# Altium PCB LEDS-SMD.PcbDoc
Units mm, origin at the board's own origin, x right, y up, seen from the top; angles counter-clockwise.
Board outline 27.69 x 26.16 mm, 2 copper layers (Top Layer, Bottom Layer); 11 components, 7 nets, 26 pads, 0 vias.
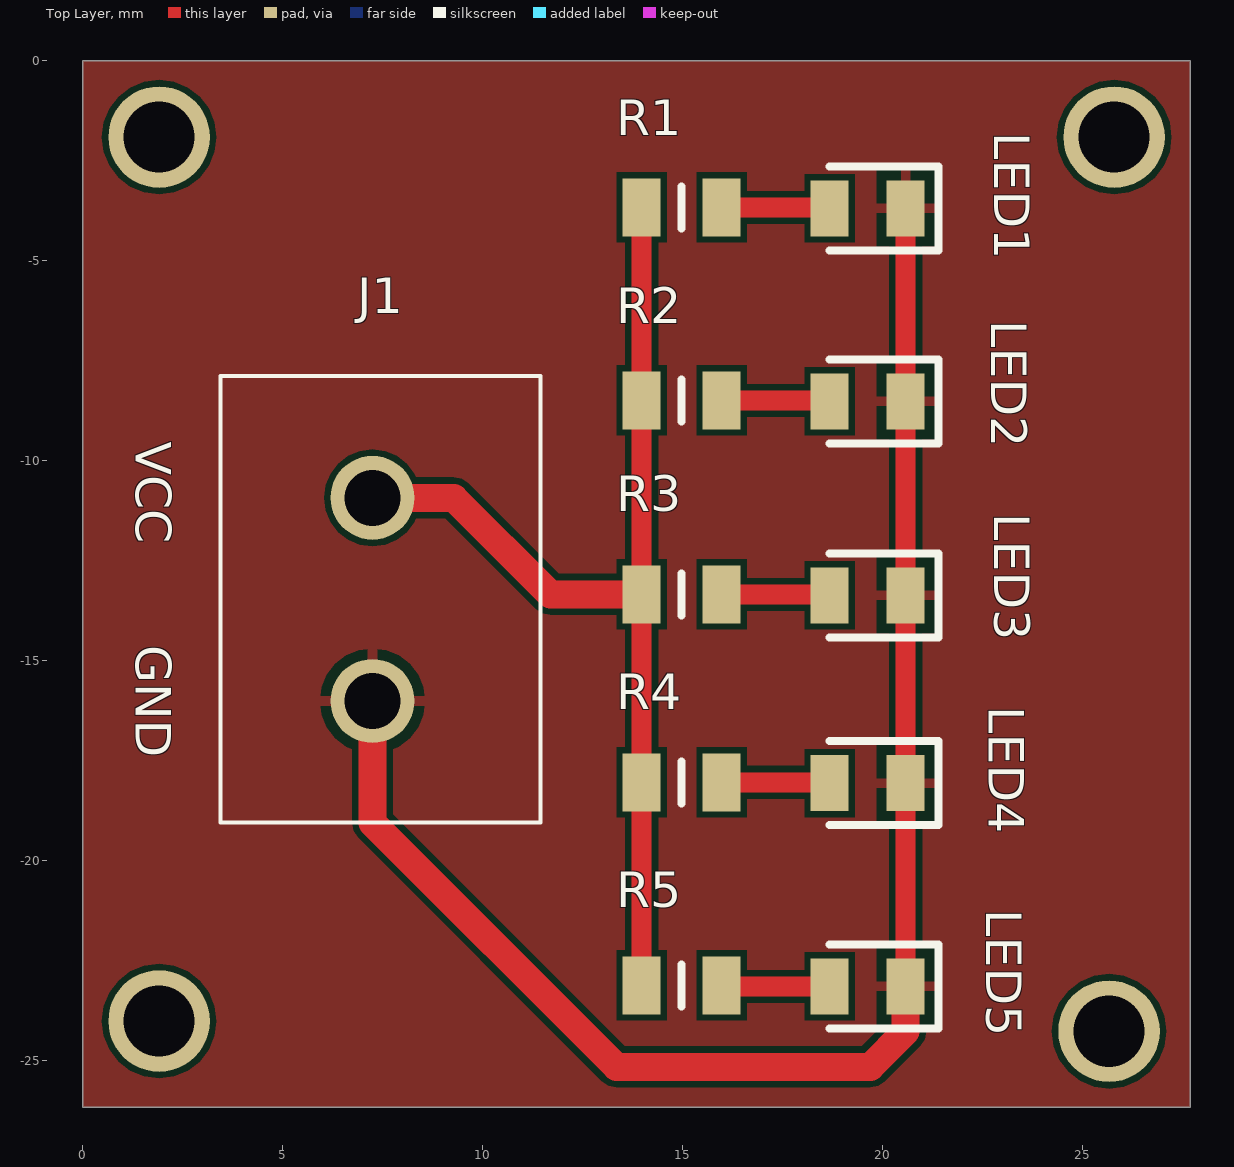
[diagram p0: Top Layer view]
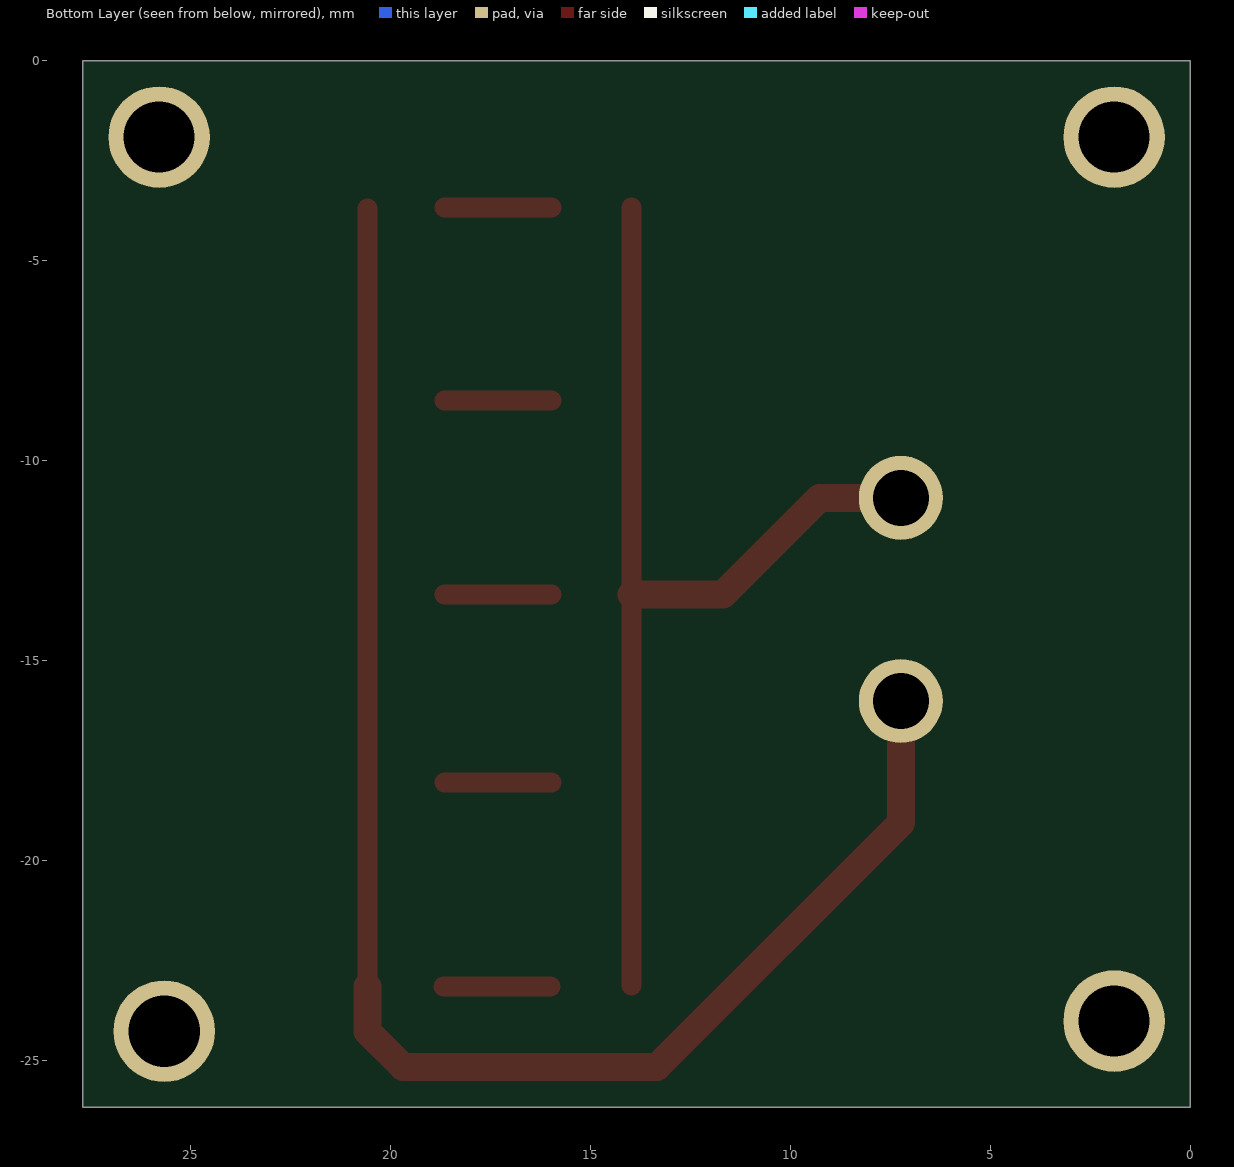
[diagram p1: Bottom Layer view, seen from below]
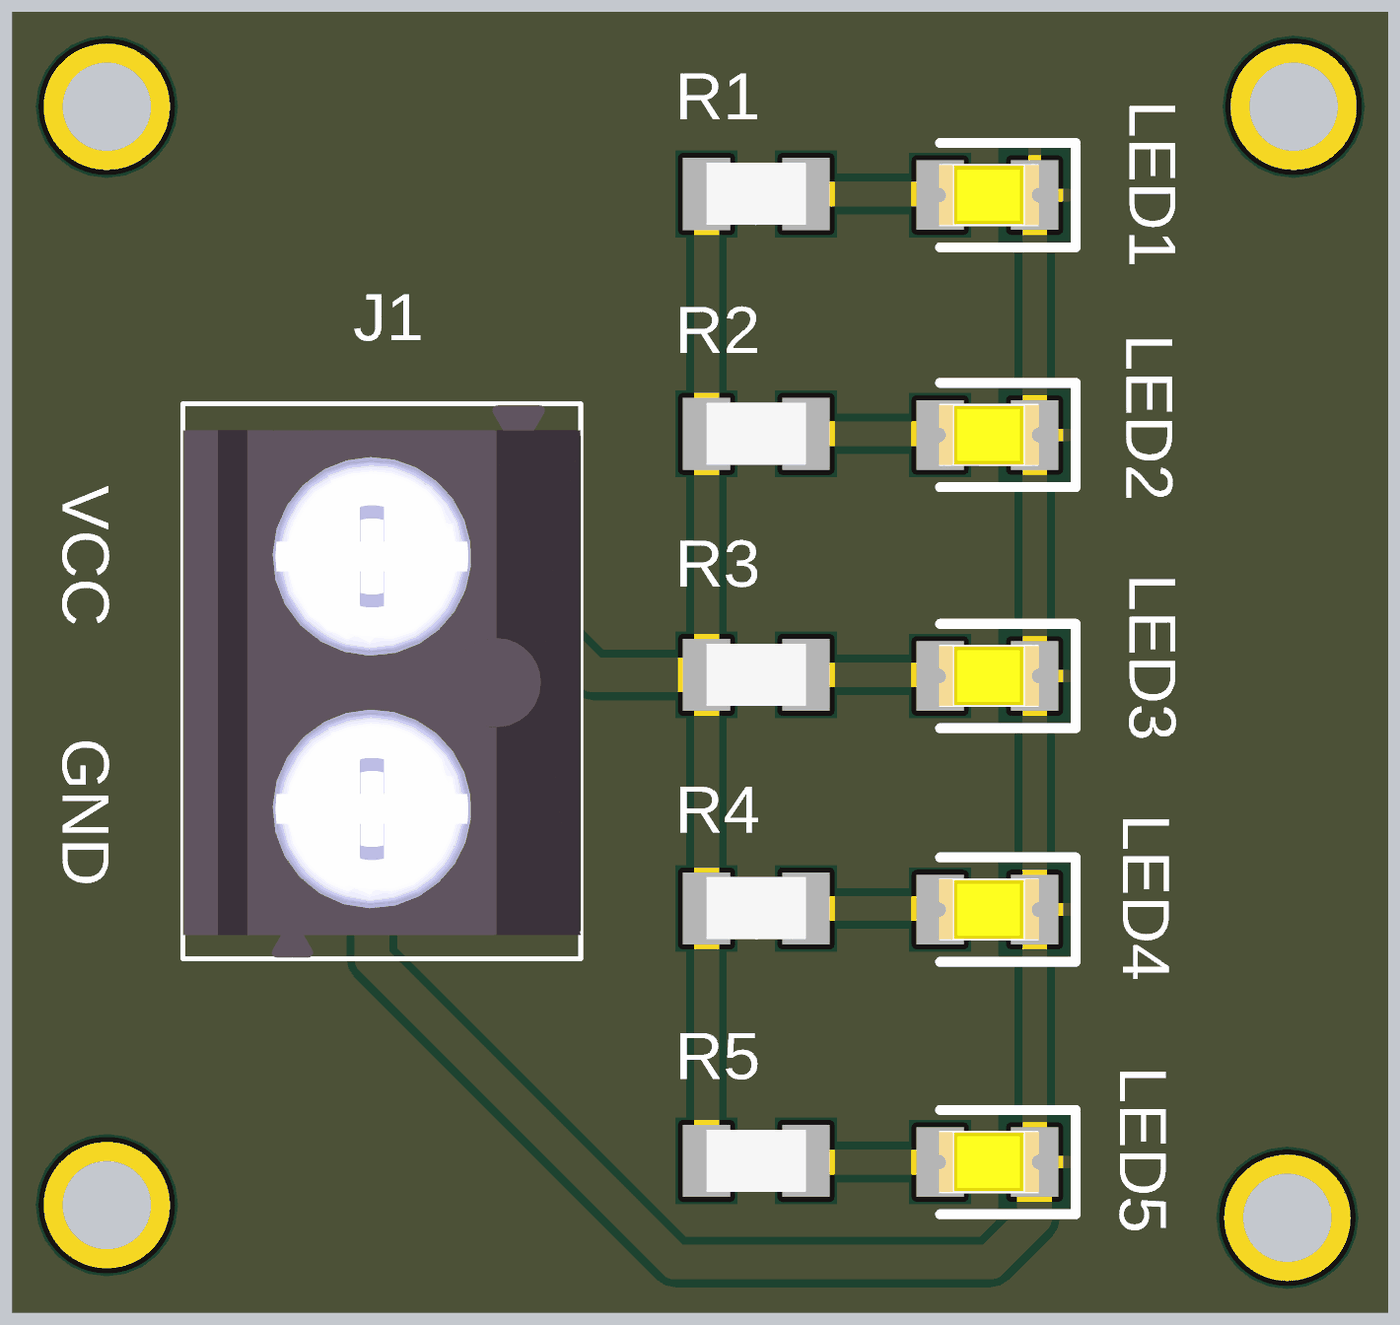
[diagram p2: 3D render of the assembled board from above, using the file's embedded part models]

## Layer stack, top to bottom
Top Solder: solder mask 0.0102, Solder Resist, Dk 3.5
Top Layer: signal copper 0.0356
Dielectric 1: dielectric 0.32, FR-4, Dk 4.8
Bottom Layer: signal copper 0.0356
Bottom Solder: solder mask 0.0102, Solder Resist, Dk 3.5

## Board outline
0,-26.162 27.686,-26.162 27.686,0 0,0

## Design rules (kind name [scope] priority, off if disabled: settings)
Clearance [All] p1: gap=0.15 ignorepadtopadclearanceinfootprint=FALSE
PolygonConnect [All] p1: connectstyle=Relief reliefconductorwidth=0.254 reliefentries=4 polygonreliefangle="90 Angle" airgapwidth=0.254
RoutingVias [All] p1: holewidth=0.711 width=1.27 viastyle="Through Hole" minholewidth=0.711 minwidth=1.27 maxholewidth=0.711 maxwidth=1.27
SolderMaskExpansion [All] p1: expansion=0.102
Width [All] p1: maxlimit=1 minlimit=0.15 preferedwidth=0.254
30 further rules are at their usual default settings.

## Components (designator, comment, footprint, x,y, rotation, side; value= is the part's Value field where it differs from the comment)
J1 "Input" 1760510000 7.239,-16.002 r90 top
LED1 "LED" LEDC2012X90N 19.619,-3.683 r180 top
LED2 "LED" LEDC2012X90N 19.619,-8.509 r180 top
LED3 "LED" LEDC2012X90N 19.619,-13.358 r180 top
LED4 "LED" LEDC2012X90N 19.619,-18.057 r180 top
LED5 "LED" LEDC2012X90N 19.619,-23.137 r180 top
R1 "56R" RESC2012X50N 14.97,-3.66 r0 top
R2 "56R" RESC2012X50N 14.97,-8.486 r0 top
R3 "56R" RESC2012X50N 14.97,-13.335 r0 top
R4 "56R" RESC2012X50N 14.97,-18.034 r0 top
R5 "56R" RESC2012X50N 14.97,-23.114 r0 top

## Footprints (in the part's own frame and the unit in brackets; to place one, negate y for a bottom-side part, rotate by r counter-clockwise, add the part's x,y. Pads: shape width x height; smd on the part's side, far side on the other; paste and mask are expansions set on the pad)
1760510000 [mm]
  round 2.1 hole 1.4: 1(0,0) 2(5.08,0)
  silkscreen extent -3.04,-4.2 8.12,3.8, body extent -3.02,-4.2 8.09,3.8, height 9.11
LEDC2012X90N [mm]
  rect 0.95x1.4 smd: 1(-0.95,0) 2(0.95,0)
  silkscreen extent -1.78,-1.05 0.95,1.05, body extent -1.05,-0.63 0.99,0.63, height 0.82
RESC2012X50N [mm]
  rect 0.95x1.45 smd: 1(-1,0) 2(1,0)
  silkscreen extent 0,-0.53 0,0.53, body extent -1,-0.62 1,0.63, height 0.45

## Part data
J1: library part 1760510000, "Connector", Manufacturer_Name=Weidmuller, Mouser Part Number=470-1760510000, Datasheet Link=http://catalog.weidmueller.com/createDatasheetForMobile.do?ordernumber=1760510000&scope1=1&scope2=1&localeId=en, Height=10mm, Manufacturer_Part_Number=1760510000, Mouser Price/Stock=https://www.mouser.co.uk/ProductDetail/Weidmuller/1760510000?qs=BTG2th8YmhTa8qcglSF3eg%3D%3D
LED1 LED2 LED3 LED4 LED5: library part HSML-C170-T0000, Manufacturer_Name="Avago Technologies", Mouser Part Number=630-HSML-C170-T0000, Datasheet Link=https://docs.broadcom.com/docs/HSML-C170-T0000-DS100, Height=0.9mm, Manufacturer_Part_Number=HSML-C170-T0000, Mouser Price/Stock=https://www.mouser.co.uk/ProductDetail/Broadcom-Avago/HSML-C170-T0000?qs=tMOYG%252Bw4%252BLxmTmD%252BKOjV4Q%3D%3D
R1 R2 R3 R4 R5: library part CRCW080556R0FKEA, "Resistor", Manufacturer_Name=Vishay, Mouser Part Number=71-CRCW080556R0FKEA, Arrow Part Number=CRCW080556R0FKEA, Arrow Price/Stock=https://www.arrow.com/en/products/crcw080556r0fkea/vishay?region=nac, Datasheet Link=http://www.vishay.com/docs/20035/dcrcwe3.pdf, Height=0.5mm, Manufacturer_Part_Number=CRCW080556R0FKEA, Mouser Price/Stock=https://www.mouser.co.uk/ProductDetail/Vishay-Dale/CRCW080556R0FKEA?qs=8UjxRNpjuULXqZI3Oden4Q%3D%3D

## Free pads (board coordinates)
  round 2.54 hole 1.778: 1(1.905,-1.905) 2(1.905,-24.003) 3(25.654,-24.257) 4(25.781,-1.905)

## Nets (pads, with @x,y where several pads share a name; then routed paths per layer and width w, separated by ;. In a path a pad name is that pad's centre, name@x,y a point inside that pad or via, vN(x,y) a via of type N, cw(c..) or ccw(c..) an arc to the next point about the centre after c; other vN are vias at no path point)
GND: J1.1 LED1.1 LED2.1 LED3.1 LED4.1 LED5.1 | length 39.8
  Top Layer w0.5: LED5.1 LED4.1 LED3.1 LED2.1 LED1.1
  Top Layer w0.7: J1.1 7.239,-19.05 13.335,-25.146 19.685,-25.146 20.569,-24.262 LED5.1
NetLED1_2: LED1.2 R1.2 | length 2.7
  Top Layer w0.254: LED1.2@18.646,-3.66 LED1.2
  Top Layer w0.5: R1.2 LED1.2@18.646,-3.66
NetLED2_2: LED2.2 R2.2 | length 2.7
  Top Layer w0.254: LED2.2@18.646,-8.486 LED2.2
  Top Layer w0.5: R2.2 LED2.2@18.646,-8.486
NetLED3_2: LED3.2 R3.2 | length 2.7
  Top Layer w0.254: LED3.2@18.646,-13.335 LED3.2
  Top Layer w0.5: R3.2 LED3.2@18.646,-13.335
NetLED4_2: LED4.2 R4.2 | length 2.7
  Top Layer w0.254: LED4.2@18.646,-18.034 LED4.2
  Top Layer w0.5: R4.2 LED4.2@18.646,-18.034
NetLED5_2: LED5.2 R5.2 | length 2.7
  Top Layer w0.254: R5.2 R5.2@15.993,-23.137
  Top Layer w0.5: R5.2@15.993,-23.137 LED5.2
VCC: J1.2 R1.1 R2.1 R3.1 R4.1 R5.1 | length 27.2
  Top Layer w0.5: R5.1 R4.1 R3.1 R2.1 R1.1
  Top Layer w0.7: J1.2 9.271,-10.922 11.684,-13.335 R3.1

## Polygon pours and split planes (outlines as drawn)
GND on Top Layer "GND_L01_P000" (solid, pour order 0): 0,-26.162 27.686,-26.162 27.686,0 0,0

## Silkscreen, mask and mechanical layers (free items; w line width, h text height)
Top Overlay:
  text "VCC" at 1.016,-9.525 h1.52 r270
  text "GND" at 1.016,-14.605 h1.52 r270
CUTOUT:
  lines w0.254: 0,-26.162 0,0 27.686,0 27.686,-7.175 27.686,-20.256 27.686,-26.162 0,-26.162